# Altium PCB sprinkler_photon_0v1.pcbdoc
Units mil, origin at the board's own origin, x right, y up, seen from the top; angles counter-clockwise.
Board outline 4000 x 2880 mil, 2 copper layers (Top Layer, Bottom Layer); 37 components, 46 nets, 143 pads, 0 vias.
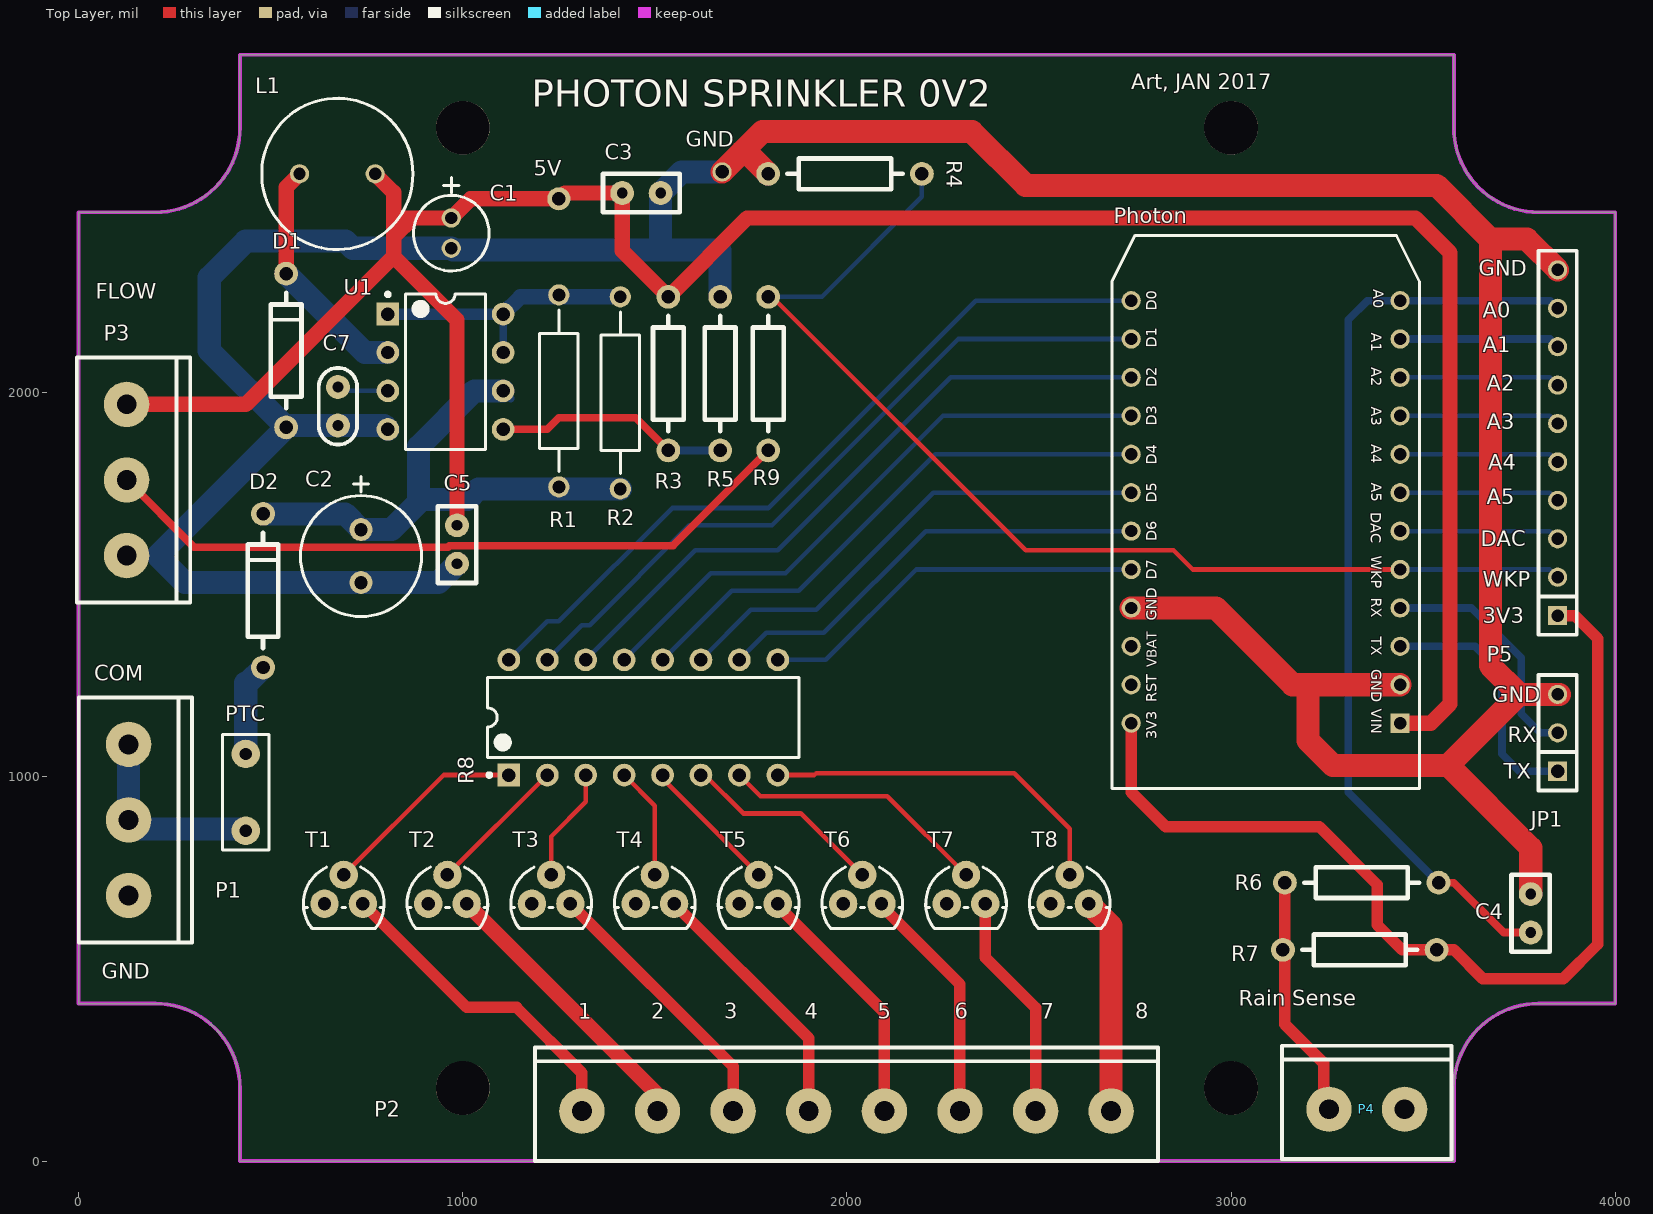
[diagram p0: Top Layer view]
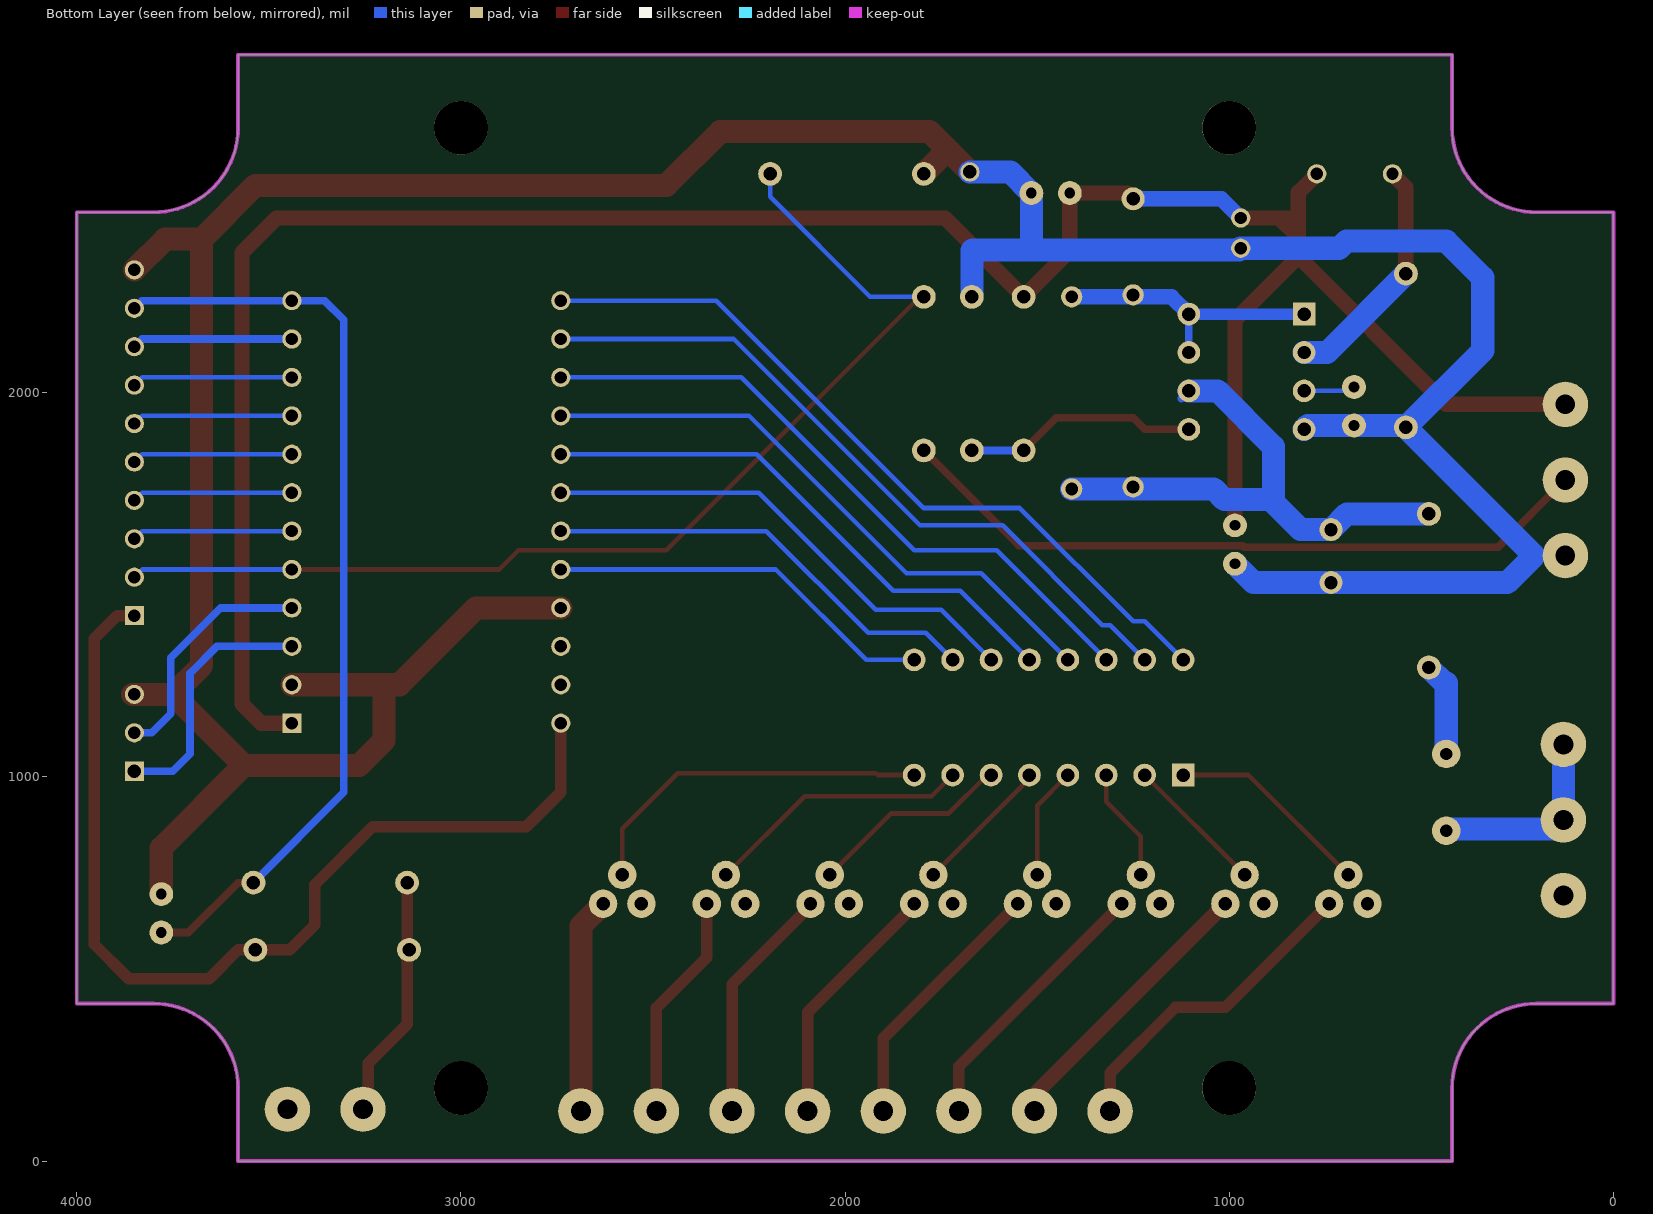
[diagram p1: Bottom Layer view, seen from below]

## Layer stack, top to bottom
Top Solder: solder mask 0.4, Solder Resist, Dk 3.5
Top Layer: signal copper 1.4
Dielectric1: core 12.6, FR-4, Dk 4.8
Bottom Layer: signal copper 1.4
Bottom Solder: solder mask 0.4, Solder Resist, Dk 3.5

## Board outline
420,0 420,190 ccw(c200,190) 200,410 0,410 0,2470 200,2470 ccw(c200,2690) 420,2690 420,2880 3580,2880 3580,2690 ccw(c3800,2690) 3800,2470 4000,2470 4000,410 3800,410 ccw(c3800,190) 3580,190 3580,0

## Design rules (kind name [scope] priority, off if disabled: settings)
Clearance AGX [(InNet('AG1') OR InNet('AG2') OR InNet('AG3') OR InNet('AG4')) vs InNet('F')] p1 off: gap=20
Clearance GNDX [(InNet('GND1') OR InNet('GND2') OR InNet('GND3') OR InNet('GND4'))] p2: gap=80
Clearance NFX [(InNet('NF1') OR InNet('NF2') OR InNet('NF3') OR InNet('NF4'))] p3: gap=80
Clearance LINEOUTX [(InNet('LINEOUT1') OR InNet('LINEOUT2') OR InNet('LINEOUT3') OR InNet('LINEOUT4'))] p4: gap=80
Clearance NEUTRAL [InNet('LINE')] p5: gap=80
Clearance "ALL TO ALL" [All] p6: gap=6
ComponentClearance [InNet('FPWR1')] p1: gap=5 collisioncheckmode=3 verticalgap=10 showdistances=FALSE
FabricationTestPointUsage TestPointUsage [All] p1 off: valid=0 allowmultiple=FALSE
FabricationTestpoint Testpoint [All] p1 off: side=3 testpointundercomponent=TRUE minsize=40 maxsize=100 preferedsize=60 minholesize=0 maxholesize=40 preferedholesize=32 testpointgrid=1 allowsidetop=TRUE allowsidebottom=TRUE usegrid=TRUE gridtolerance=0.01
FanoutControl Fanout_Small [(CompPinCount < 5)] p1 off: bgadir=Out bgaviamode=Centered fanoutstyle=Auto fanoutdirection=OutThenIn viagrid=1 // Fanout_Small (Default Rule)
FanoutControl Fanout_SOIC [IsSOIC] p2: bgadir=Out bgaviamode=Centered fanoutstyle=Auto fanoutdirection=Alternating viagrid=1 // Fanout_SOIC (Default Rule)
FanoutControl Fanout_LCC [IsLCC] p3: bgadir=Out bgaviamode=Centered fanoutstyle=Auto fanoutdirection=Alternating viagrid=1 // Fanout_LCC (Default Rule)
FanoutControl Fanout_BGA [IsBGA] p4: bgadir=Out bgaviamode=Centered fanoutstyle=Auto fanoutdirection=Alternating viagrid=1 // Fanout_BGA (Default Rule)
Height [All] p1 off: minheight=0 maxheight=1000 prefheight=500
HoleSize [All] p1: absolutevalues=TRUE maxlimit=150 minlimit=12 maxpercent=80.000 minpercent=20.000
MinimumAnnularRing [All] p1: minimumring=3
MinimumSolderMaskSliver [All] p1: minsoldermaskwidth=4
PlaneClearance "HIGH VOLTAGE NETS" [(InNet('GND1') OR InNet('GND2') OR InNet('GND3') OR InNet('GND4') OR InNet('NF1') OR InNet('NF2') OR InNet('NF3') OR InNet('NF4') OR InNet('LINEOUT1') OR InNet('LINEOUT2') OR InNet('LINEOUT3') OR InNet('LINEOUT4'))] p1: clearance=120
PlaneClearance "Neutral PP clearance" [InNet('NEUTRAL')] p2: clearance=80
PlaneConnect Vias [IsVia] p1: planeconnectstyle=Direct reliefexpansion=20 reliefentries=4 reliefconductorwidth=10 reliefairgap=10
PlaneConnect Pads [IsPad] p2: planeconnectstyle=Relief reliefexpansion=16 reliefentries=4 reliefconductorwidth=10 reliefairgap=8
PolygonConnect pad [ispad] p1: connectstyle=Relief reliefconductorwidth=10 reliefentries=4 polygonreliefangle="90 Angle" airgapwidth=10
PolygonConnect Via [isvia] p2: connectstyle=Direct reliefconductorwidth=10 reliefentries=4 polygonreliefangle="90 Angle" airgapwidth=10
RoutingVias [All] p1: holewidth=16 width=32 viastyle="Through Hole" minholewidth=12 minwidth=24 maxholewidth=28 maxwidth=50
SilkToSolderMaskClearance SilkscreenOverComponentPads [IsPad] p1: minsilkscreentomaskgap=4 clearancetoexposedcopper=TRUE
SolderMaskExpansion [All] p1: expansion=4
Width "Supply Nets Width" [(InNet('5V') OR InNet('3V3') OR InNet('GND'))] p1: maxlimit=60 minlimit=10 preferedwidth=30 minimp=50.000000 maximp=50.000000 favimp=50.000000
Width "All the rest" [All] p2: maxlimit=200 minlimit=6 preferedwidth=12
17 further rules are at their usual default settings.

## Components (designator, comment, footprint, x,y, rotation, side; value= is the part's Value field where it differs from the comment)
5V "TP" SIP-1#1 1250,2505 r0 top
C1 "220uF" RB-2MM-5MM 970,2455 r270 top
C2 "100uF" RB-3.5MM-8MM 735,1575 r270 top
C3 "100nF" RAD-0.1 1415,2520 r0 top
C4 "100nF" RAD-0.1 3780,595 r90 top
C5 "100nF" RAD-0.1 985,1655 r270 top
C7 "220p" RADCAP-0.1 675,2015 r270 top
D1 "1N5819" "AXIAL-0.4 - DIODE" 540,1910 r90 top
D2 "1N4001" "AXIAL-0.4 - DIODE" 480,1285 r90 top
GND "TP" SIP-1#2 1675,2575 r0 top
JP1 "JP3" SIP-3 3850,1015 r90 top
L1 "220uh" "RB-5MM - 9MMDIA" 575,2570 r0 top
P1 "OSTTC03" OSTTC03#1 130,1085 r270 top
P2 "OSTTC080162" OSTTC08 1310,130 r0 top
P3 "OSTTC03" OSTTC03#2 125,1970 r270 top
P4 "OSTTC02" OSTTC02 3255,135 r0 top
P5 "10PIN-SIL" SIP-10 3850,1420 r90 top
Photon "Photon" PHOTON 3440,1140 r180 top
PTC "PTCPTH" PTC 435,960 r90 top
R1 "1R0" AXIAL-0.5 1250,2005 r270 top
R2 "1R0" AXIAL-0.5 1410,2000 r270 top
R3 "30K" AXIAL-0.4 1535,2250 r270 top
R4 "20K" AXIAL-0.4 1795,2570 r0 top
R5 "10K" AXIAL-0.4 1670,1850 r90 top
R6 "10K" AXIAL-0.4 3140,725 r0 top
R7 "30K" AXIAL-0.4 3135,550 r0 top
R8 "R-PACK-8-16" DIP-16 1470,1155 r90 top
R9 "10K" AXIAL-0.4 1795,1850 r90 top
T1 "MAC97" TO-92 690,670 r0 top
T2 "MAC97" TO-92 960,670 r0 top
T3 "MAC97" TO-92 1230,670 r0 top
T4 "MAC97" TO-92 1500,670 r0 top
T5 "MAC97" TO-92 1770,670 r0 top
T6 "MAC97" TO-92 2040,670 r0 top
T7 "MAC97" TO-92 2310,670 r0 top
T8 "MAC97" TO-92 2580,670 r0 top
U1 "MC33063/34063" DIP8 955,2055 r0 top

## Footprints (in the part's own frame and the unit in brackets; to place one, negate y for a bottom-side part, rotate by r counter-clockwise, add the part's x,y. Pads: shape width x height; smd on the part's side, far side on the other; paste and mask are expansions set on the pad)
AXIAL-0.4 [mil]
  round 62 hole 35: 1(0,0) 2(400,0)
  silkscreen extent 50,-40 350,40
"AXIAL-0.4 - DIODE" [mil]
  round 62 hole 35: 1(0,0) 2(400,0)
  silkscreen extent 50,-40 350,40
AXIAL-0.5 [mm] "Axial Device, Thru-Hole; 2 Leads; 0.5 in Pin Spacing"
  round 1.4 hole 0.85: 1(-6.35,0) 2(6.35,0)
  silkscreen extent -5.33,-1.27 5.33,1.27
DIP8 [mm] "DIP, 8-Leads, Row Spacing 7.62mm, Pitch 2.54mm, Body 9.91x6.73mm"
  rect 1.5x1.5 hole 0.889: 1(-3.81,3.81)
  round 1.5 hole 0.889: 2(-3.81,1.27) 3(-3.81,-1.27) 4(-3.81,-3.81) 5(3.81,-3.81) 6(3.81,-1.27) 7(3.81,1.27) 8(3.81,3.81)
  silkscreen extent -3.93,-5.15 2.65,5.23, body extent -3.6,-5.15 3.6,5.15, height 5.08
DIP-16 [mm] "DIP; 16 Leads; Row Spacing 7.62 mm; Pitch 2.54 mm"
  rect 1.5x1.5 hole 0.889: 1(-3.81,8.89)
  round 1.5 hole 0.889: 2(-3.81,6.35) 3(-3.81,3.81) 4(-3.81,1.27) 5(-3.81,-1.27) 6(-3.81,-3.81) 7(-3.81,-6.35) 8(-3.81,-8.89) 9(3.81,-8.89) 10(3.81,-6.35) 11(3.81,-3.81) 12(3.81,-1.27) 13(3.81,1.27) 14(3.81,3.81) 15(3.81,6.35) 16(3.81,8.89)
  silkscreen extent -3.93,-10.3 2.65,10.31, body extent -3.6,-10.28 3.6,10.28, height 5.08
OSTTC02 [mm] "2 pin  TERMIBLOK Header  5mm pitch"
  round 3 hole 1.321: 1(0,0) 2(5,0)
  silkscreen extent -3.1,-3.3 8.1,4.2
OSTTC03#1 [mm] "3 pin  TERMIBLOK Header  5mm pitch"
  round 3 hole 1.321: 1(0,0) 2(5,0)
  round 3 hole 1.321 unplated: 3(10,0)
  silkscreen extent -3.1,-3.3 13.1,4.2
OSTTC03#2 [mm] "3 pin  TERMIBLOK Header  5mm pitch"
  round 3 hole 1.3: 1(0,0) 2(5,0)
  round 3 hole 1.3 unplated: 3(10,0)
  silkscreen extent -3.1,-3.3 13.1,4.2
OSTTC08 [mm] "3 pin  TERMIBLOK Header  5mm pitch"
  round 3 hole 1.321: 1(0,0) 2(5,0)
  round 3 hole 1.321 unplated: 3(10,0) 4(15,0) 5(20,0) 6(25,0) 7(30,0) 8(35,0)
  silkscreen extent -3.1,-3.3 38.1,4.2
PHOTON [mil] "Photon Body"
  rect 50x50 hole 32: 1(0,0)
  round 50 hole 32: 2(0,-100) 3(0,-200) 4(0,-300) 5(0,-400) 6(0,-500) 7(0,-600) 8(0,-700) 9(0,-800) 10(0,-900) 11(0,-1000) 12(0,-1100) 13(700,-1100) 14(700,-1000) 15(700,-900) 16(700,-800) 17(700,-700) 18(700,-600) 19(700,-500) 20(700,-400) 21(700,-300) 22(700,-200) 23(700,-100) 24(700,0)
  silkscreen extent -50,-1270 750,170
PTC [mil]
  round 74 hole 32: 1(-100,0) 2(100,0)
  silkscreen extent -150,-60 150,60
RAD-0.1 [mil]
  round 62 hole 28: 1(0,0) 2(100,0)
  silkscreen extent -50,-50 150,50
RADCAP-0.1 [mil]
  round 62 hole 28: 1(0,0) 2(100,0)
  silkscreen extent -50,-50 150,50
RB-2MM-5MM [mil] "rADIAL eLECTROLYTIC cAP"
  round 50 hole 32: 1(0,0) 2(78.74,0)
  silkscreen extent -105,-98 138,98
RB-3.5MM-8MM [mil] "wide case"
  round 60 hole 35: 1(-68.9,0) 2(68.9,0)
  silkscreen extent -207,-157 157,157
"RB-5MM - 9MMDIA" [mil] "Radial Inductor"
  round 50 hole 32: 1(0,0) 2(196.85,0)
  silkscreen extent -98,-197 295,197
SIP-1#1 [mil]
  round 60 hole 35: 1(0,0)
SIP-1#2 [mil]
  round 50 hole 35: 1(0,0)
SIP-3 [mil]
  rect 50x50 hole 35: 1(0,0)
  round 50 hole 32: 2(100,0) 3(200,0)
  silkscreen extent -50,-50 250,50
SIP-10 [mil]
  rect 50x50 hole 32: 1(0,0)
  round 50 hole 32: 2(100,0) 3(200,0) 4(300,0) 5(400,0) 6(500,0) 7(600,0) 8(700,0) 9(800,0) 10(900,0)
  silkscreen extent -50,-50 950,50
TO-92 [mil]
  round 74 hole 35: 1(-50,0) 2(0,75) 3(50,0)
  silkscreen extent -105,-65 105,95

## Part data
5V GND: library part TPS, "Test Point"
C1: library part "CAP POL", "CAP ALUM 220UF 6.3V 20% RADIAL"
C2: library part "CAP POL", "CAP ALUM 100UF 50V 20% RADIAL"
C3 C4 C5: library part "CAP NP", "CAP CER 0.1UF 25V 10% RADIAL"
C7: library part C-EU025-024X044, "CAP CER 220PF 100V 5% RADIAL"
D1: library part "DIODE SCHOTTKY", "DIODE SCHOTTKY 40V 1A DO-41"
D2: library part DIODE, "RECTIFIER 50V 1A DO-41"
JP1: "3 PIN JUMPER"
L1: library part INDUCTOR, "Inductor"
P1 P3: library part 3PIN-POW, "TERMINAL BLOCK 5MM VERT 3POS PCB"
P2: library part 8PIN-POW, "TERMINAL BLOCK 5MM VERT 8POS PCB"
P4: library part 2PIN-POW, "TERMINAL BLOCK 5MM VERT 2POS PCB"
PTC: "FUSE PTC RESETTABLE .75A HOLD"
R1: library part R-EU_0204/2V
R2: library part R-EU_0204/2V, "RES 1 OHM 1/2W 5% CF MINI"
R3 R7: library part R-EU_0204/7, "RES 30.1K OHM MET FILM .40W 1%"
R4: library part R-EU_0204/7, "RES 20K OHM 1/4W 5% CARBON FILM"
R5: library part R-EU_0204/7, "RES MF 1/4W 10K OHM 1% AXIAL"
R6 R9: library part R-EU_0204/7, "RES 10K OHM 1/4W 5% CF MINI"
R8: "RES ARRAY 330 OHM 8 RES 16-DIP"
T1 T2 T3 T4 T5 T6 T7 T8: library part LX807DE, "THYRISTOR TRIAC .6A 600V TO92"
U1: library part MC33063/MC34063P

## Free pads (board coordinates)
  round 140 hole 140 unplated: ""(1000,190) ""(1000,2690) ""(3000,190) ""(3000,2690)

## Nets (pads, with @x,y where several pads share a name; then routed paths per layer and width w, separated by ;. In a path a pad name is that pad's centre, name@x,y a point inside that pad or via, vN(x,y) a via of type N, cw(c..) or ccw(c..) an arc to the next point about the centre after c; other vN are vias at no path point)
3V3: P5.1 Photon.24 R7.2 | length 2619.5
  Top Layer w30: Photon.24 2740,960 2830,870 3230,870 3380,720 3380,615 3445,550 R7.2 3580,550 3655,475 3865,475 3955,565 3955,1360 3895,1420 P5.1
5V0: 5V.1 C1.1 C3.1 C5.1 L1.2 P3.1 Photon.1 R3.1 | length 6653.7
  Top Layer w40: P3.1 435,1970 820,2355 ; L1.2 820,2521.85 820,2455 ; C5.1 985,2190 820,2355 ; Photon.1 3520,1140 3570,1190 3570,2365 3480,2455 1740,2455 R3.1 1415,2370 C3.1 1265,2520 5V.1 1020,2505 C1.1 870,2455 ; 820,2355 820,2405 ; 820,2405 820,2455 ; 820,2405 870,2455 ; 820,2455 870,2455
  Bottom Layer w40: C1.1 1020,2505 5V.1
A1: P5.8 Photon.11 | length 418.3
  Bottom Layer w20: Photon.11 3830,2140 P5.8
A2: P5.7 Photon.10 | length 418.3
  Bottom Layer w12: Photon.10 3830,2040 P5.7
A3: P5.6 Photon.9 | length 418.3
  Bottom Layer w12: Photon.9 3830,1940 P5.6
A4: P5.5 Photon.8 | length 418.3
  Bottom Layer w12: Photon.8 3830,1840 P5.5
A5: P5.4 Photon.7 | length 418.3
  Bottom Layer w12: Photon.7 3830,1740 P5.4
D0: Photon.13 R8.16 | length 2007.3
  Bottom Layer w12: R8.16 1220,1405 1250,1405 1545,1700 1795,1700 2335,2240 Photon.13
D1: Photon.14 R8.15 | length 1865.9
  Bottom Layer w12: R8.15 1310,1395 1330,1395 1590,1655 1805,1655 2290,2140 Photon.14
D2: Photon.15 R8.14 | length 1724.4
  Bottom Layer w12: R8.14 1605,1590 1820,1590 2270,2040 Photon.15
D3: Photon.16 R8.13 | length 1583
  Bottom Layer w12: R8.13 1645,1530 1840,1530 2250,1940 Photon.16
D4: Photon.17 R8.12 | length 1441.6
  Bottom Layer w12: R8.12 1700,1485 1875,1485 2230,1840 Photon.17
D5: Photon.18 R8.11 | length 1300.2
  Bottom Layer w12: R8.11 1750,1435 1920,1435 2225,1740 Photon.18
D6: Photon.19 R8.10 | length 1158.8
  Bottom Layer w12: R8.10 1790,1375 1940,1375 2205,1640 Photon.19
D7: Photon.20 R8.9 | length 1017.3
  Bottom Layer w12: R8.9 1945,1305 2180,1540 Photon.20
DAC: P5.3 Photon.6 | length 418.3
  Bottom Layer w12: Photon.6 3830,1640 P5.3
FLOW: P5.2 Photon.5 R4.2 R9.2 | length 2925.1
  Top Layer w12: R9.2 1805,2250 2465,1590 2850,1590 2900,1540 Photon.5
  Bottom Layer w12: R9.2 1935,2250 2195,2510 R4.2 ; Photon.5 3830,1540 P5.2
GND: C1.2 C2.2 C3.2 C4.2 C5.2 C7.2 D1.1 GND.1 JP1.3 P1.3 P3.3 P4.2 P5.10 Photon.2 Photon.21 R4.1 R5.2 T1.1 T2.1 T3.1 T4.1 T5.1 T6.1 T7.1 T8.1 U1.4 | length 9666
  Top Layer w60: GND.1 1727.5,2627.5 ; R4.1 1737.5,2627.5 1727.5,2627.5 ; Photon.21 2960,1440 3160,1240 3200,1240 ; Photon.2 3200,1240 ; C4.2 3780,815 3565,1030 ; P5.10 3770,2400 3675,2400 ; JP1.3@3855,1215 3750,1215 ; 1727.5,2627.5 1780,2680 2325,2680 2465,2540 3535,2540 3675,2400 ; 3200,1240 3200,1095 3265,1030 3565,1030 ; 3565,1030 3750,1215 ; 3675,2400 3675,1290 3750,1215
  Bottom Layer w60: P1.3@124.7,691.3 P1.3 ; U1.4 795,1915 C7.2 545,1915 D1.1 ; C5.2 936.1,1506.1 C2.2 276.5,1506.1 206.3,1576.3 D1.1 ; R5.2 1670,2370 1668.74,2371.26 1515,2371.26 ; GND.1 1570,2575 C3.2 1515,2371.26 ; D1.1 340,2110 340,2300 435,2395 695,2395 713.74,2376.26 C1.2 975,2371.26 1515,2371.26
NetC2_1: C2.1 D2.2 R1.2 R2.2 U1.6 | length 1444.3
  Bottom Layer w20: U1.6 U1.6@1125,1985
  Bottom Layer w60: D2.2 693.9,1685 C2.1 813.9,1643.9 885,1715 ; U1.6 1030,2005 885,1860 885,1715 ; R2.2 1040.75,1750 1012.75,1722 892,1722 885,1715
NetC7_1: C7.1 U1.3 | length 134.1
  Bottom Layer w12: C7.1 685,2005 U1.3
NetD1_2: D1.2 L1.1 U1.2 | length 624.4
  Top Layer w40: D1.2 540,2535 L1.1
  Bottom Layer w60: D1.2 745,2105 U1.2
NetD2_1: D2.1 PTC.2 | length 246.6
  Bottom Layer w60: PTC.2 435,1245 440,1245 D2.1
NetP1_1: P1.1 P1.2 PTC.1 | length 506.4
  Bottom Layer w60: P1.1 P1.2 153.15,865 PTC.1@430,865
NetP2_1: P2.1 T1.3 | length 852.3
  Top Layer w30: T1.3 1010,400 1140,400 1310,230 P2.1
NetP2_2: P2.2 T2.3 | length 745.8
  Top Layer w40: T2.3 1506.85,173.15 P2.2
NetP2_3: P2.3 T3.3 | length 715.5
  Top Layer w30: T3.3 1703.7,246.3 P2.3
NetP2_4: P2.4 T4.3 | length 685.2
  Top Layer w30: T4.3 1900.55,319.45 P2.4
NetP2_5: P2.5 T5.3 | length 654.9
  Top Layer w30: T5.3 1820,665 2097.4,387.6 P2.5
NetP2_6: P2.6 T6.3 | length 624.6
  Top Layer w30: T6.3 2090,665 2294.25,460.75 P2.6
NetP2_7: P2.7 T7.3 | length 594.3
  Top Layer w30: T7.3 2360,530 2491.1,398.9 P2.7
NetP2_8: P2.8 T8.3 | length 564
  Top Layer w60: T8.3 2687.95,612.05 P2.8
NetP3_2: P3.2 R9.1 | length 1847
  Top Layer w20: P3.2 300.25,1597.9 961.43,1597.9 965.53,1602 1547,1602 R9.1
NetP4_1: P4.1 R6.1 R7.1 | length 637.6
  Top Layer w30: R6.1 3140,356.57 3241.57,255 3241.57,148.43 P4.1
NetR1_1: R1.1 R2.1 U1.1 U1.7 U1.8 | length 718.6
  Bottom Layer w20: U1.7 U1.8
  Bottom Layer w30: U1.1 U1.8
  Bottom Layer w40: U1.8 1150,2250 R2.1@1405,2250
NetR3_2: R3.2 R5.1 U1.5 | length 612.6
  Top Layer w20: U1.5 1220,1905 1250,1935 1450,1935 R3.2
  Bottom Layer w20: R3.2 R5.1
NetR8_1: R8.1 T1.2 | length 537.7
  Top Layer w12: T1.2 950,1005 R8.1
NetR8_2: R8.2 T2.2 | length 367.7
  Top Layer w12: T2.2 R8.2
NetR8_3: R8.3 T3.2 | length 297.3
  Top Layer w12: T3.2 1230,845 1320,935 R8.3
NetR8_4: R8.4 T4.2 | length 293.1
  Top Layer w12: R8.4 1500,925 T4.2
NetR8_5: R8.5 T5.2 | length 363.6
  Top Layer w12: R8.5 1520,995 T5.2
NetR8_6: R8.6 T6.2 | length 527.7
  Top Layer w12: R8.6 1630,1005 1730,905 1880,905 T6.2
NetR8_7: R8.7 T7.2 | length 697.7
  Top Layer w12: R8.7 1775,950 2105,950 T7.2
NetR8_8: R8.8 T8.2 | length 935.1
  Top Layer w12: R8.8 1915,1005 ; 1920,1010 2435,1010 2580,865 T8.2
RAINSENSE: C4.1 P5.9 Photon.12 R6.2 | length 2430.2
  Top Layer w20: R6.2 3580,725 3710,595 C4.1
  Bottom Layer w20: R6.2 3305,960 3305,2190 3355,2240 Photon.12 3830,2240 P5.9
RX: JP1.2 Photon.4 | length 634.6
  Bottom Layer w20: Photon.4 3625,1440 3755,1310 3755,1165 3805,1115 JP1.2 JP1.2@3855,1115
TX: JP1.1 Photon.3 | length 672.6
  Bottom Layer w20: Photon.3 3635,1340 3705,1270 3705,1060 3750,1015 JP1.1 JP1.1@3855,1015
pads on no net: Photon.22 Photon.23

## Keep-outs
Keep-Out Layer:
  the board outline again, w10

## Silkscreen, mask and mechanical layers (free items; w line width, h text height)
Top Overlay:
  text "Serpac WM-032RC Enclosure" at 75,3315 h50
  text "All units are in inch" at 2635,3300 h50
  text "Front" at 45,3095 h100
  text "Art, JAN 2017" at 2740,2790 h40
  text "PHOTON SPRINKLER 0V2" at 1180,2745 h70
  text "GND" at 3645,2305 h40
  text "FLOW" at 45,2245 h40
  text "A0" at 3655,2195 h40
  text "A1" at 3655,2105 h40
  text "A2" at 3665,2005 h40
  text "A3" at 3665,1905 h40
  text "A4" at 3670,1800 h40
  text "A5" at 3665,1710 h40
  text "DAC" at 3650,1600 h40
  text "WKP" at 3655,1495 h40
  text "3V3" at 3655,1400 h40
  text "COM" at 40,1250 h40
  text "GND" at 3680,1195 h40
  text "RX" at 3720,1090 h40
  text "TX" at 3710,995 h40
  text "GND" at 60,475 h40
  text "Rain Sense" at 3020,405 h40
  text "1" at 1300,370 h40
  text "2" at 1490,370 h40
  text "3" at 1680,370 h40
  text "4" at 1890,370 h40
  text "5" at 2080,370 h40
  text "6" at 2280,370 h40
  text "7" at 2505,370 h40
  text "8" at 2750,370 h40
Mechanical 1:
  the board outline again, w10
Mechanical 12:
  lines w16: 30,3050 4030,3050

## Dimensions
0,410 to 4000,410 on Mechanical 13
3580,0 to 420,190 on Mechanical 13
3580,2880 to 3580,0 on Mechanical 13
200,190 to 205,170 on Mechanical 13
420,190 to 420,0 on Mechanical 13
3800,410 to 4000,195 on Mechanical 13
4000,410 to 4000,2470 on Mechanical 13

## Text inside footprints (layer, text, board x,y; h text height)
Photon: Top Overlay "A0" at 3370,2270 h27.2 r270.02; Top Overlay "A1" at 3365,2156 h27.2 r270.02; Top Overlay "A2" at 3365,2066 h27.2 r270.02; Top Overlay "RX" at 3365,1467 h27.2 r270.02; Top Overlay "A4" at 3365,1866 h27.2 r270.02; Top Overlay "A3" at 3365,1964 h27.2 r270.02; Top Overlay "A5" at 3365,1766 h27.2 r270.02; Top Overlay "DAC" at 3364,1689 h27.2 r270.02; Top Overlay "WKP" at 3365,1576 h27.2 r270.02; Top Overlay "D0" at 2806,2214 h27.2 r90; Top Overlay "D1" at 2806,2117 h27.2 r90; Top Overlay "D2" at 2806,2014 h27.2 r90; Top Overlay "D3" at 2806,1914 h27.2 r90; Top Overlay "D4" at 2806,1813 h27.2 r90; Top Overlay "D5" at 2806,1714 h27.2 r90; Top Overlay "D6" at 2806,1614 h27.2 r90; Top Overlay "D7" at 2806,1514 h27.2 r90; Top Overlay "GND" at 2807,1406 h27.2 r90; Top Overlay "VBAT" at 2806,1286 h25.5 r90; Top Overlay "RST" at 2807,1195 h27.2 r90; Top Overlay "3V3" at 2806,1098 h27.2 r90; Top Overlay "TX" at 3365,1365 h27.2 r270.02; Top Overlay "GND" at 3365,1281 h27.2 r270.02; Top Overlay "VIN" at 3365,1177 h27.2 r270.02